# Altium PCB PCB1.PcbDoc
Units mm, origin at the board's own origin, x right, y up, seen from the top; angles counter-clockwise.
Board outline 50 x 50 mm, 4 copper layers (Top Layer, GND_t, GND_b, Bottom Layer), stack 0.442 mm thick; 82 components, 56 nets, 311 pads, 384 vias.
Unrouted connection lines stored in the file: 3.
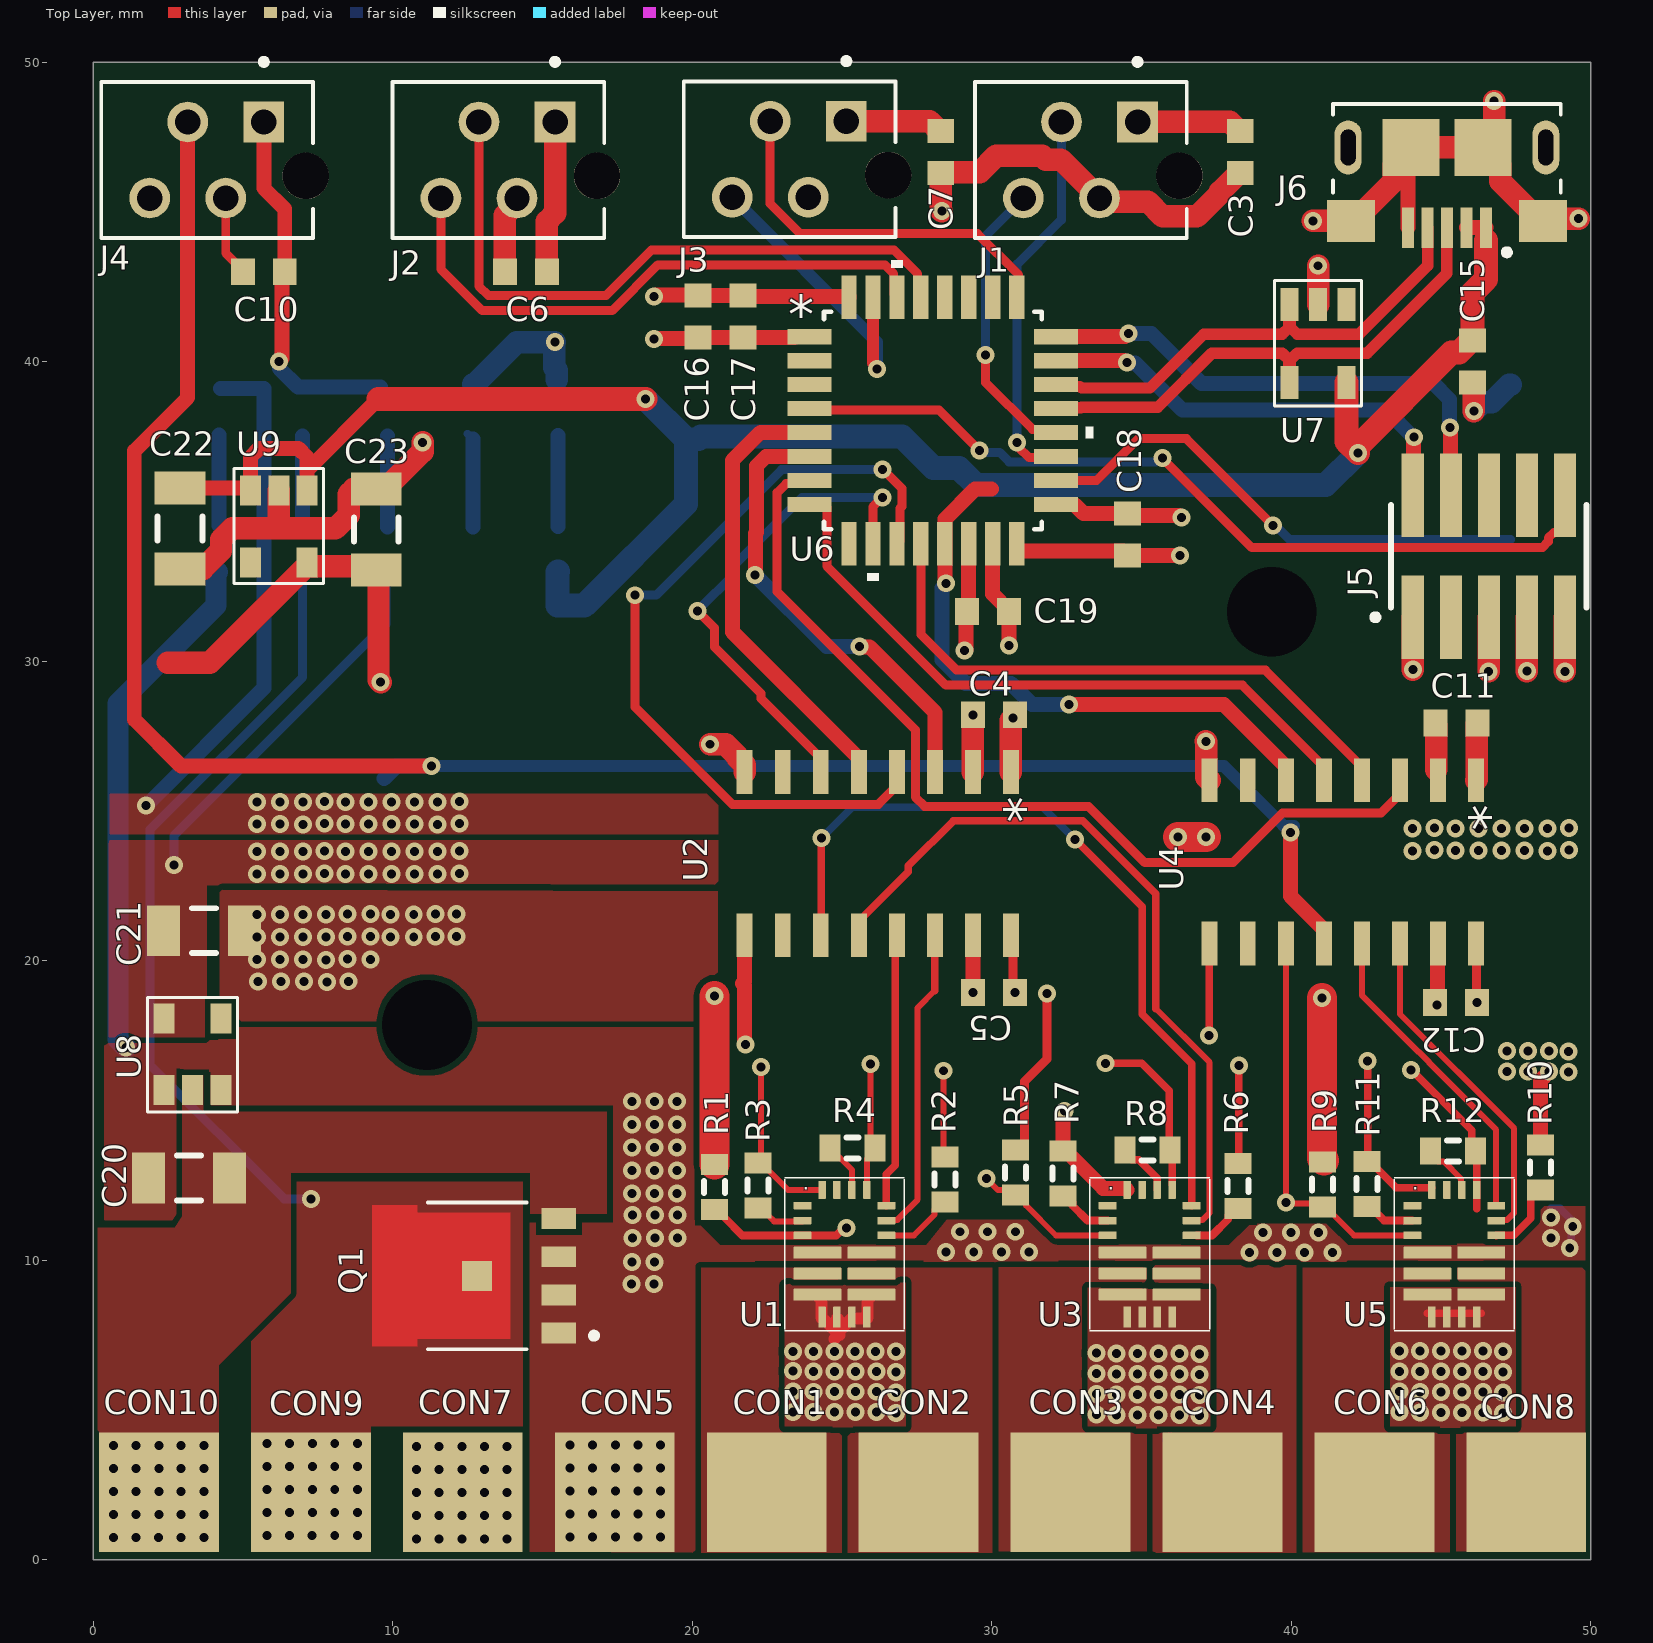
[diagram p0: Top Layer view]
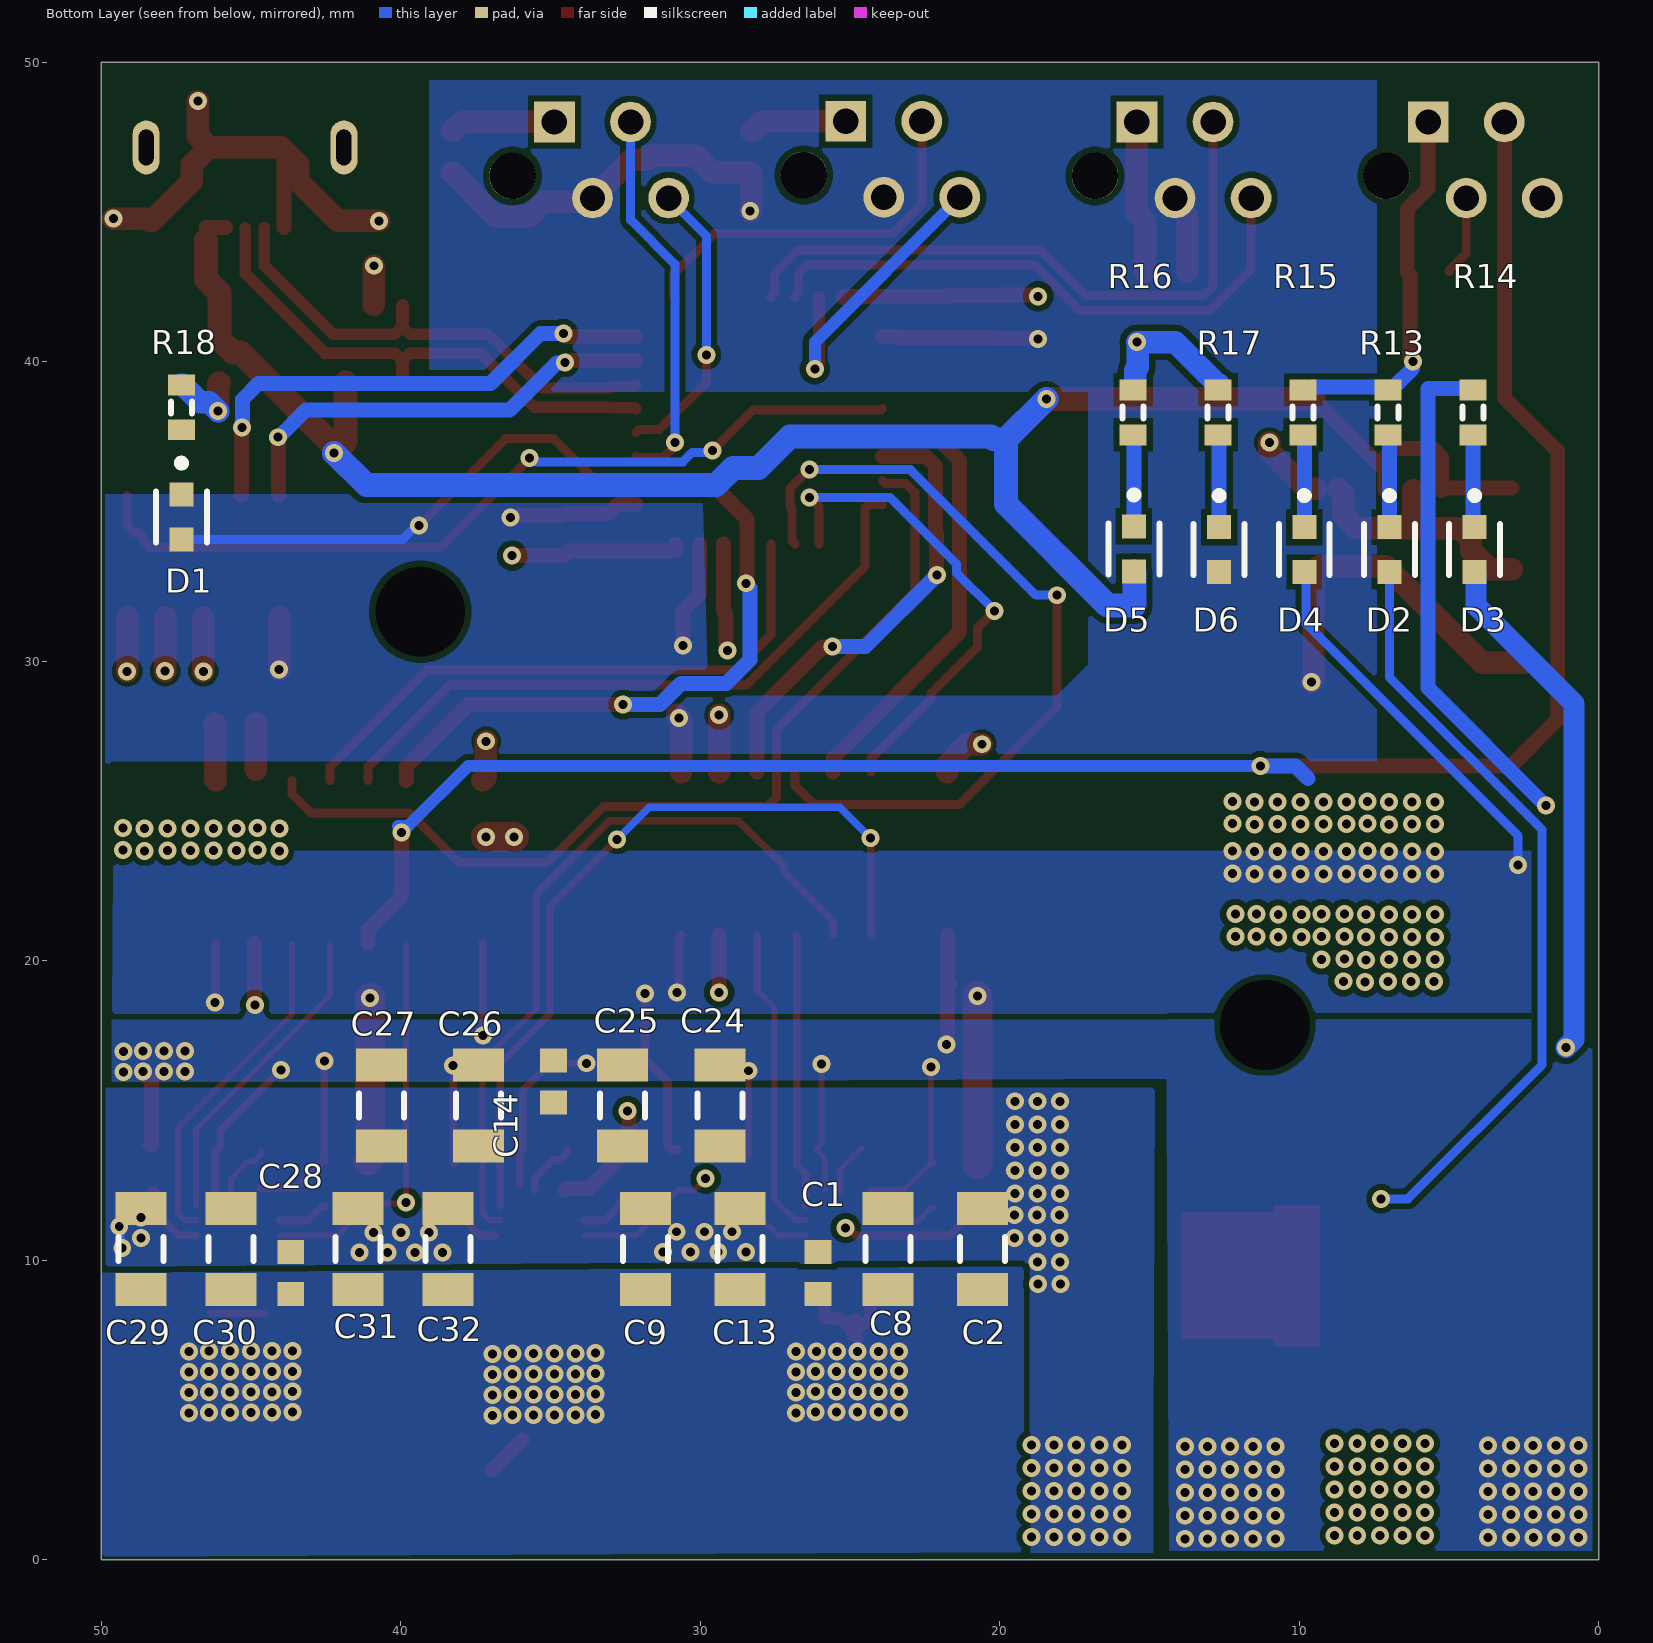
[diagram p1: Bottom Layer view, seen from below]
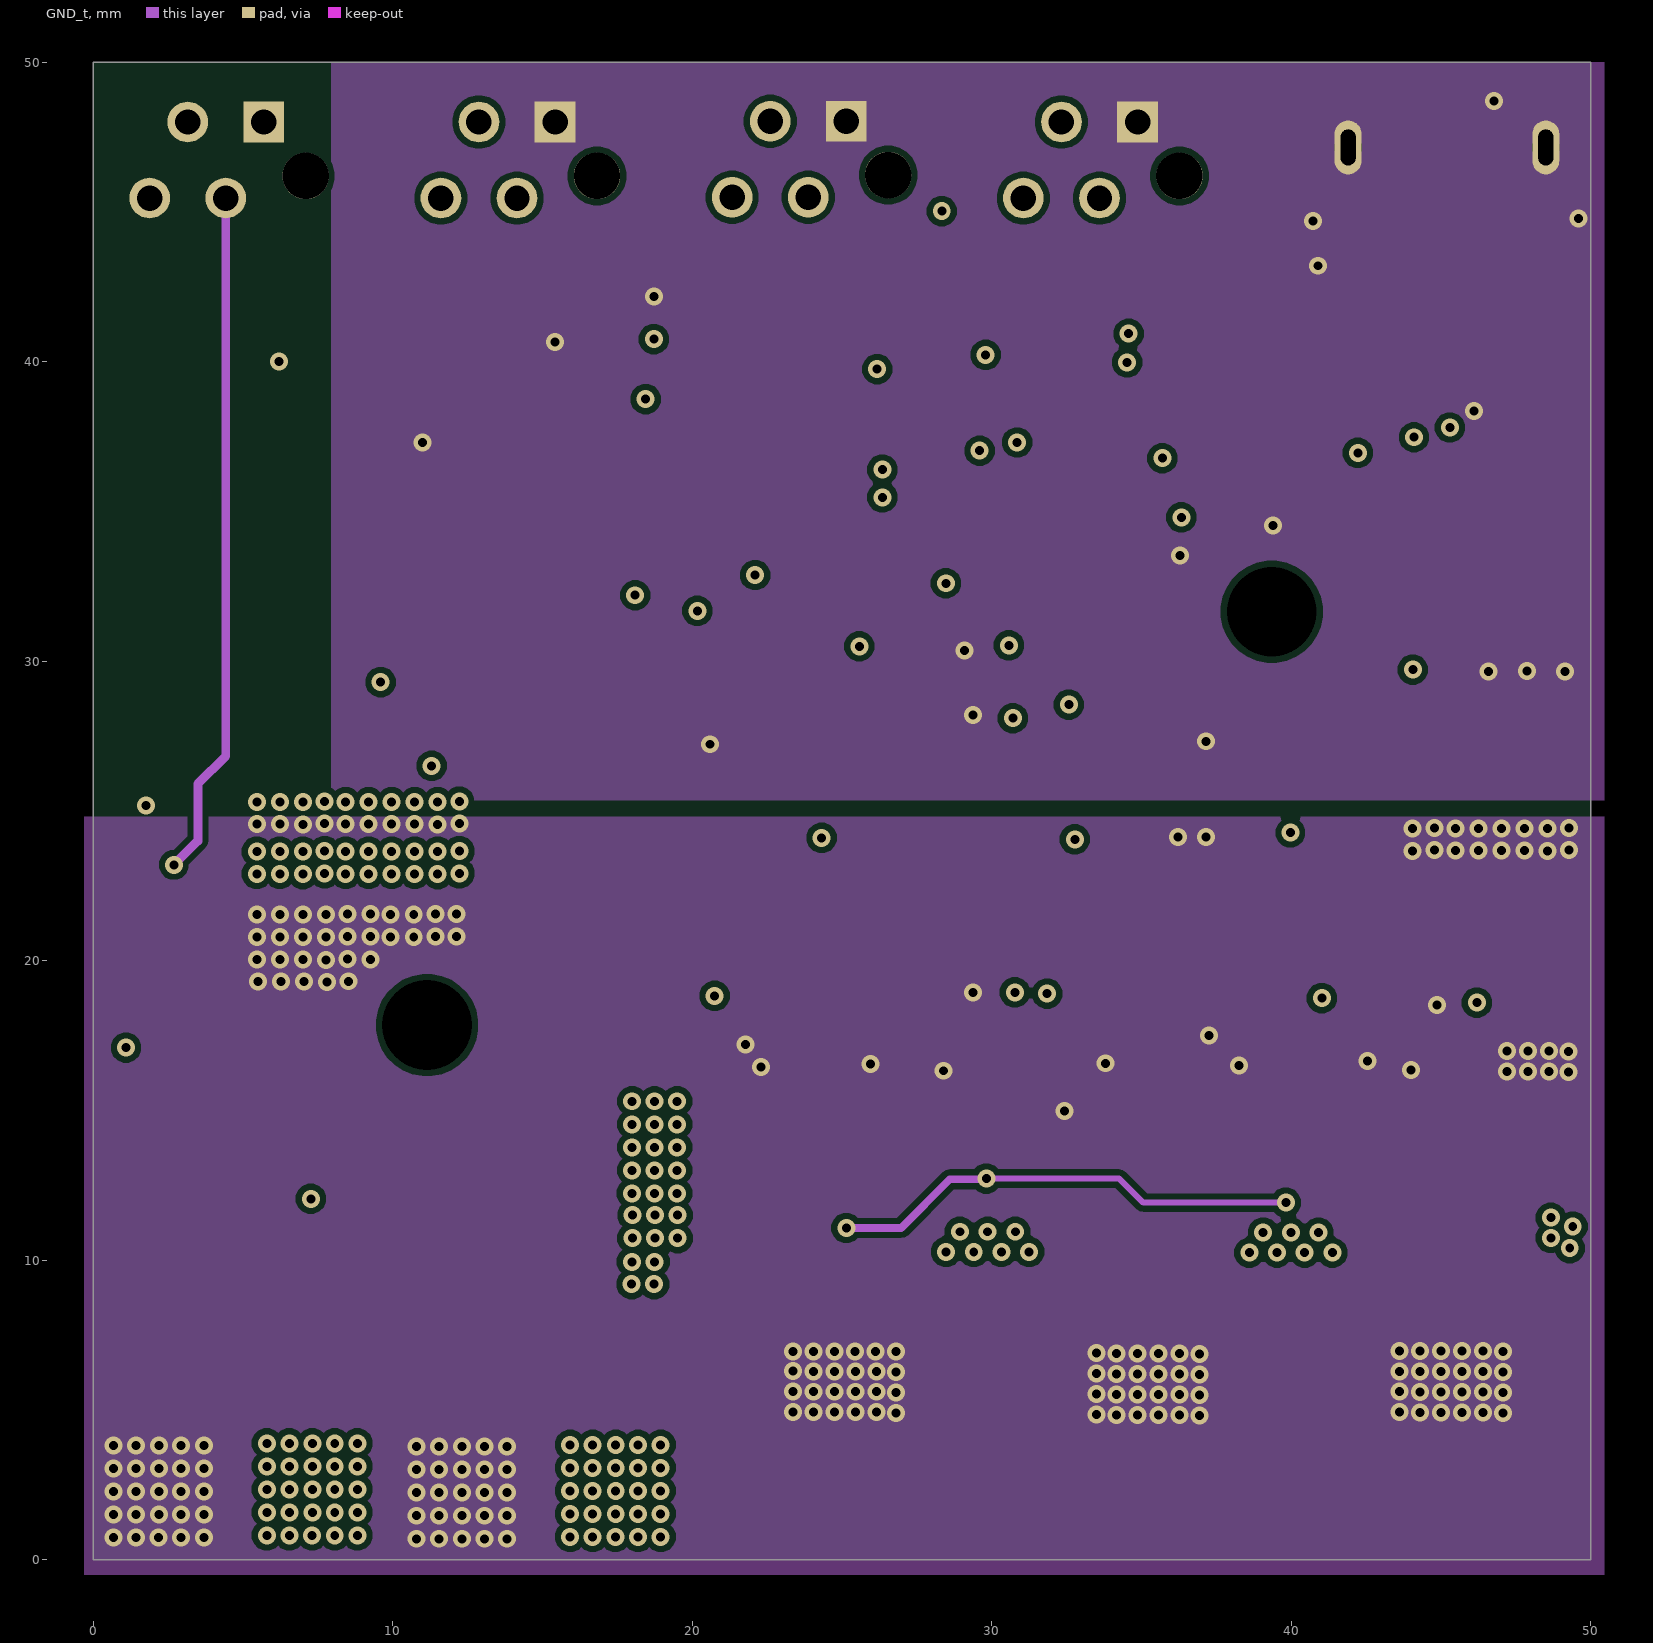
[diagram p2: GND_t]
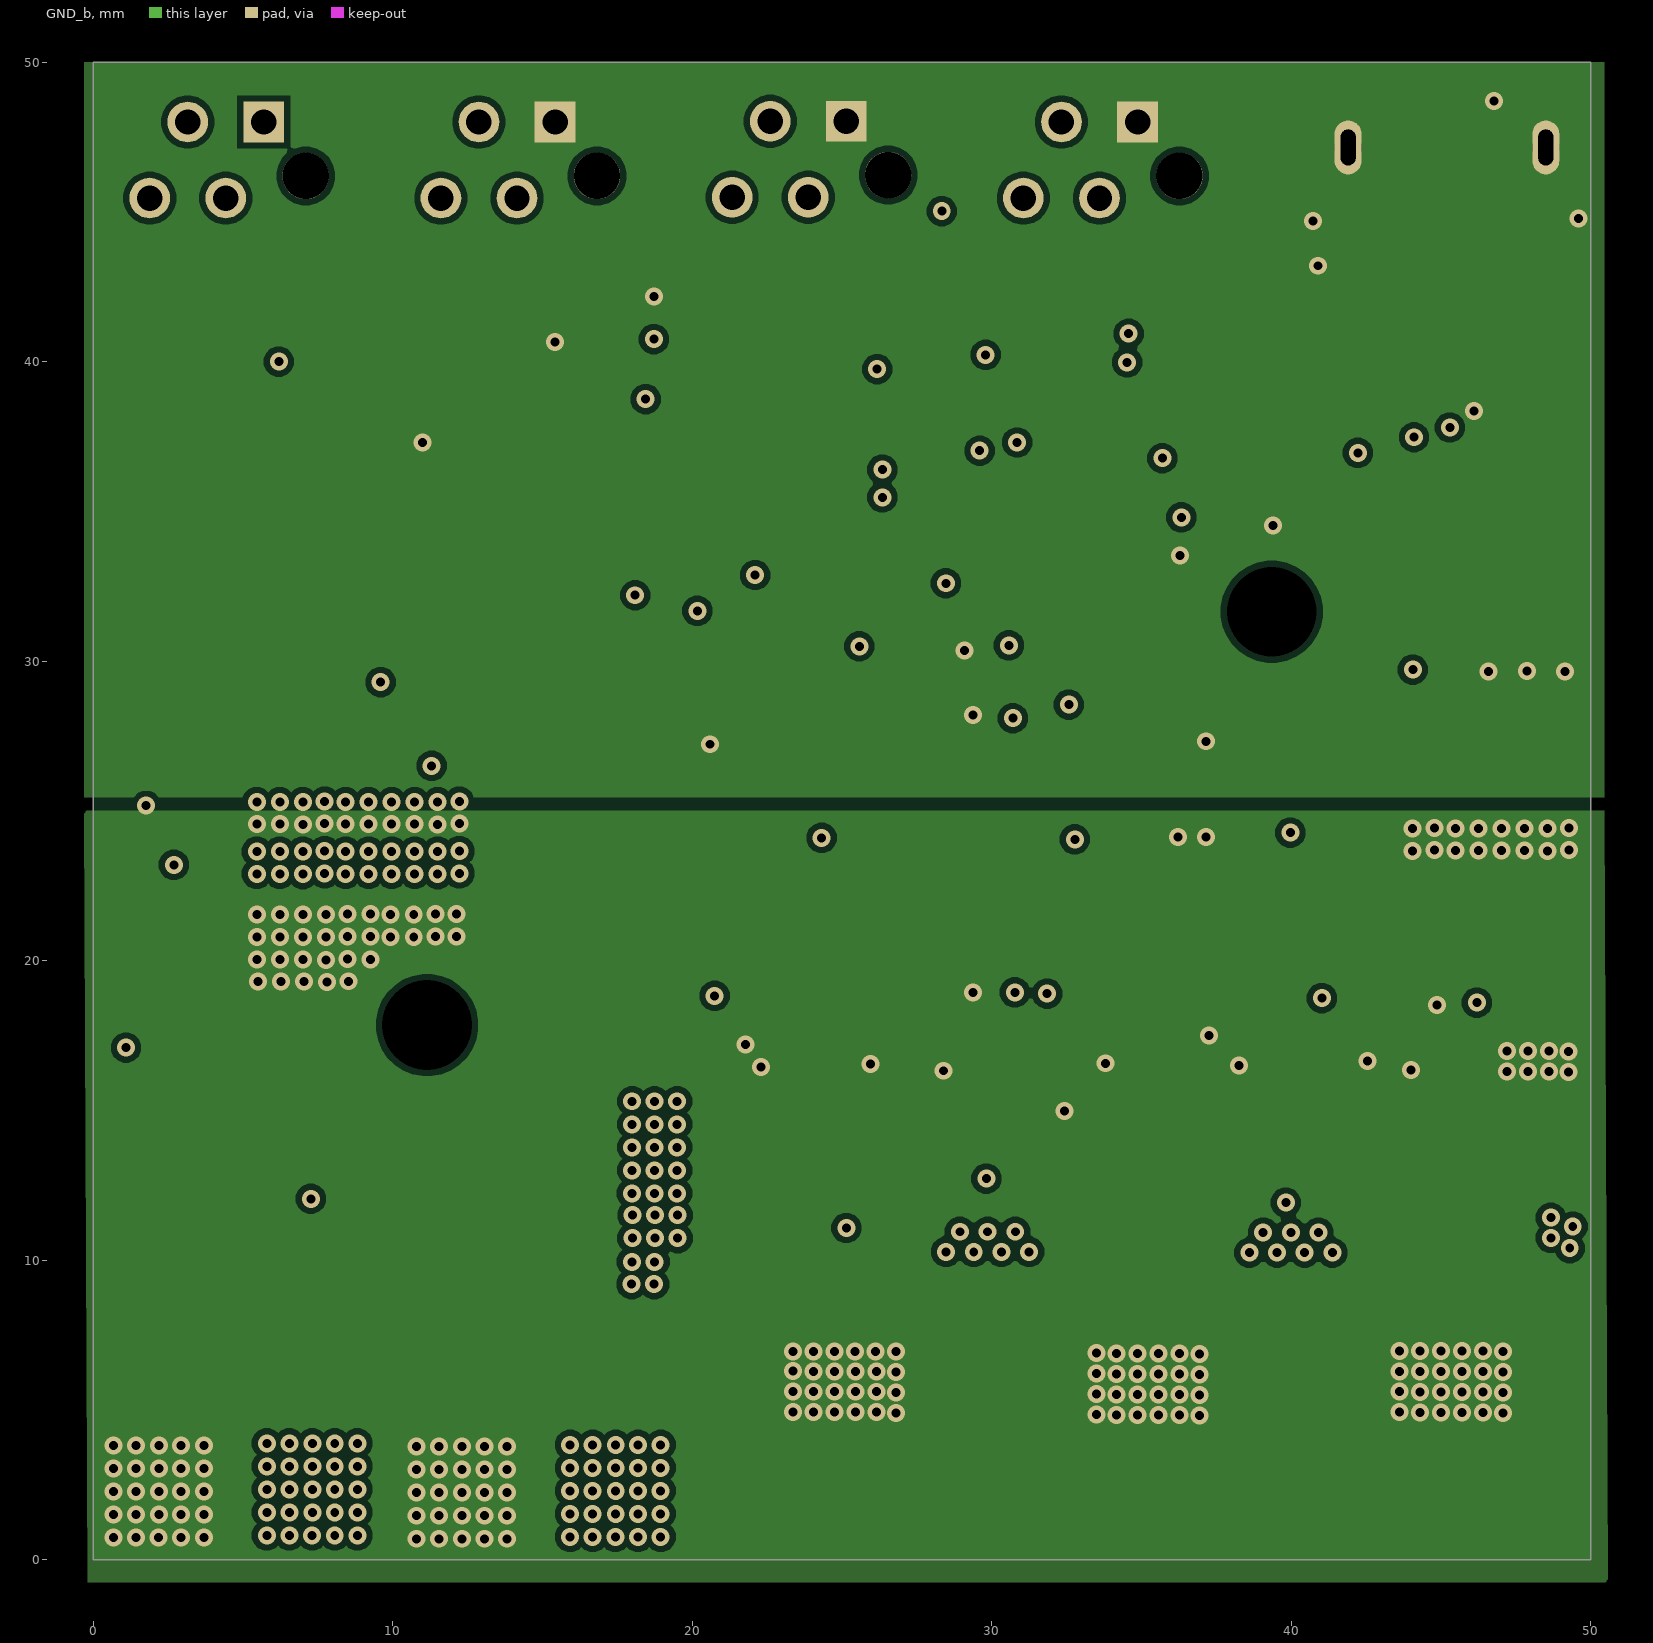
[diagram p3: GND_b]

## Layer stack, top to bottom
Top Solder: solder mask 0.0102, Solder Resist, Dk 3.5
Top Layer: signal copper 0.035
Dielectric 2: prepreg 0.1, PP-006, Dk 4.1
GND_t: signal copper 0.035
Dielectric 1: core 0.1016, Core-009, Dk 4.5
GND_b: signal copper 0.035
Dielectric 3: prepreg 0.1, PP-006, Dk 4.1
Bottom Layer: signal copper 0.035
Bottom Solder: solder mask 0.0102, Solder Resist, Dk 3.5

## Board outline
0,0 50,0 50,50 0,50

## Design rules (kind name [scope] priority, off if disabled: settings)
Clearance [All] p1: gap=0.2 ignorepadtopadclearanceinfootprint=TRUE except(0: Arc-Hole Track-Hole SMDPad-Hole THPad-Hole Via-Hole Fill-Hole Poly-Hole Region-Hole Text-Hole)
DiffPairsRouting [All] p1: maxlimit=0.254 minlimit=0.254 mostfreqgap=0.254 toplayer_minwidth=0.381 toplayer_maxwidth=0.381 toplayer_prefwidth=0.381 midlayer1_minwidth=0.381 midlayer1_maxwidth=0.381 midlayer1_prefwidth=0.381 midlayer2_minwidth=0.381 midlayer2_maxwidth=0.381 midlayer2_prefwidth=0.381 bottomlayer_minwidth=0.381 bottomlayer_maxwidth=0.381 bottomlayer_prefwidth=0.381 maxuncoupledlength=12.7
MinimumSolderMaskSliver [All] p1: minsoldermaskwidth=0.1
PolygonConnect [All] p1: connectstyle=Direct reliefconductorwidth=0.254 reliefentries=4 polygonreliefangle="90 Angle" airgapwidth=0.254
RoutingVias [All] p1: holewidth=0.3 width=0.6 viastyle="Through Hole" minholewidth=0.2 minwidth=0.45 maxholewidth=3 maxwidth=5
SolderMaskExpansion [All] p1: expansion=0.05 istentingtop=FALSE
Width [All] p1: maxlimit=2 minlimit=0.1 preferedwidth=0.254
28 further rules are at their usual default settings.

## Classes and differential pairs
differential pair class diff_USB: USB_D
component class Motorcontroller: C1 C2 C3 C4 C5 C6 C7 C8 C9 C10 C11 C12 C13 C14 C24 C25 C26 C27 C28 C29 C30 C31 C32 CON1 CON2 CON3 CON4 CON5 CON6 CON7 CON8 J1 J2 J3 J4 R1 R2 R3 R4 R5 R6 R7 R8 R9 R10 R11 R12 U1 U2 U3 U4 U5
component class Mainboard: C15 C16 C17 C18 C19 C20 C21 C22 C23 CON9 CON10 D1 D2 D3 D4 D5 D6 J5 J6 Q1 R13 R14 R15 R16 R17 R18 U6 U7 U8 U9
differential pair USB_D: +USB_D_P -USB_D_N

## Components (designator, comment, footprint, x,y, rotation, side; value= is the part's Value field where it differs from the comment)
C1 "Cap Semi" 1608[0603] 26.075,9.575 r90 bottom value=100nF
C2 "Cap Semi" C1206 20.575,10.375 r90 bottom value=10uF
C3 "Cap Semi" 1608[0603] 38.3,47 r270 top value=100nF
C4 "Cap Semi" 1608[0603] 30.075,28.209 r0 top value=100nF
C5 "Cap Semi" 1608[0603] 30.075,18.941 r0 top value=100nF
C6 "Cap Semi" 1608[0603] 14.45,43 r180 top value=100nF
C7 "Cap Semi" 1608[0603] 28.3,47 r270 top value=100nF
C8 "Cap Semi" C1206 23.729,10.375 r90 bottom value=10uF
C9 "Cap Semi" C1206 31.825,10.375 r90 bottom value=10uF
C10 "Cap Semi" 1608[0603] 5.7,43 r180 top value=100nF
C11 "Cap Semi" 1608[0603] 45.524,27.931 r0 top value=100nF
C12 "Cap Semi" 1608[0603] 45.5,18.6 r0 top value=100nF
C13 "Cap Semi" C1206 28.671,10.375 r90 bottom value=10uF
C14 "Cap Semi" 1608[0603] 34.9,15.969 r270 bottom value=100nF
C15 "Cap Semi" 1608[0603] 46.05,40 r90 top value=100pF
C16 "Cap Semi" 1608[0603] 20.2,41.5 r270 top value=1uF
C17 "Cap Semi" 1608[0603] 21.7,41.5 r270 top value=10nF
C18 "Cap Semi" 1608[0603] 34.535,34.225 r90 top value=100nF
C19 "Cap Semi" 1608[0603] 29.875,31.65 r0 top value=100nF
C20 "Cap Semi" C1206 3.2,12.75 r180 top value=10uF
C21 "Cap Semi" C1206 3.7,21 r180 top value=10uF
C22 "Cap Semi" C1206 2.906,34.425 r90 top value=10uF
C23 "Cap Semi" C1206 9.454,34.4 r270 top value=10uF
C24 "Cap Semi" C1206 29.346,15.169 r270 bottom value=10uF
C25 "Cap Semi" C1206 32.596,15.169 r270 bottom value=10uF
C26 "Cap Semi" C1206 37.4,15.169 r270 bottom value=10uF
C27 "Cap Semi" C1206 40.65,15.169 r270 bottom value=10uF
C28 "Cap Semi" 1608[0603] 43.675,9.575 r90 bottom value=100nF
C29 "Cap Semi" C1206 48.675,10.375 r90 bottom value=10uF
C30 "Cap Semi" C1206 45.675,10.375 r90 bottom value=10uF
C31 "Cap Semi" C1206 41.425,10.375 r90 bottom value=10uF
C32 "Cap Semi" C1206 38.425,10.375 r90 bottom value=10uF
CON1 "Moter1 +" con_soldering 22.589,2.25 r0 top
CON2 "Motor1 -" con_soldering 27.661,2.25 r0 top
CON3 "Motor2 +" con_soldering 32.733,2.25 r0 top
CON4 "Motor2 -" con_soldering 37.806,2.25 r0 top
CON5 "Thrower +" con_soldering 17.517,2.25 r0 top
CON6 "Motor3 +" con_soldering 42.878,2.25 r0 top
CON7 "Thrower -" con_soldering 12.444,2.25 r0 top
CON8 "Motor3 -" con_soldering 47.95,2.25 r0 top
CON9 "BAT+" con_soldering 7.372,2.25 r0 top
CON10 "BAT-" con_soldering 2.2,2.35 r90 top
D1 "LTST-C190GKT" FP-LTST-C190GKT-MFG 47.325,34.81 r270 bottom
D2 "LTST-C190GKT" FP-LTST-C190GKT-MFG 6.994,33.725 r270 bottom
D3 "LTST-C190GKT" FP-LTST-C190GKT-MFG 4.15,33.725 r270 bottom
D4 "LTST-C190GKT" FP-LTST-C190GKT-MFG 9.838,33.725 r270 bottom
D5 "LTST-C190GKT" FP-LTST-C190GKT-MFG 15.525,33.75 r270 bottom
D6 "LTST-C190GKT" FP-LTST-C190GKT-MFG 12.681,33.725 r270 bottom
J1 "Encoder_1" TE_7-215079-4 34.87,48 r0 top
J2 "Encoder_2" TE_7-215079-4 15.423,48 r0 top
J3 "Encoder_3" TE_7-215079-4 25.147,48.025 r0 top
J4 "PWM_thrower" TE_7-215079-4 5.7,48 r0 top
J5 "FTSH-105-XX-X-DV" SAMTEC_FTSH-105-XX-X-DV 46.6,33.5 r0 top
J6 "10118193-0001LF" FCI_10118193-0001LF 45.2,47.15 r180 top
Q1 "BUK6Y10-30P" TRANS_PSMN5R5-60YS,115 12.825,9.48 r180 top
R1 "Res3" J1-0603 20.746,12.45 r90 top value=10K
R2 "Res3" J1-0603 28.45,12.7 r90 top value=10K
R3 "Res3" J1-0603 22.2,12.5 r90 top value=3.3K
R4 "Res3" J1-0603 25.35,13.75 r0 top value=100K
R5 "Res3" J1-0603 30.8,12.925 r90 top value=10K
R6 "Res3" J1-0603 38.225,12.475 r90 top value=10K
R7 "Res3" J1-0603 32.375,12.9 r90 top value=3.3K
R8 "Res3" J1-0603 35.2,13.675 r0 top value=100K
R9 "Res3" J1-0603 41.05,12.525 r90 top value=10K
R10 "Res3" J1-0603 48.325,13.1 r90 top value=10K
R11 "Res3" J1-0603 42.525,12.55 r90 top value=3.3K
R12 "Res3" J1-0603 45.4,13.65 r0 top value=100K
R13 "Res3" J1-0603 7.038,38.304 r270 bottom value=15K
R14 "Res3" J1-0603 4.2,38.304 r270 bottom value=15K
R15 "Res3" J1-0603 9.875,38.304 r270 bottom value=3.9K
R16 "Res3" J1-0603 15.55,38.304 r270 bottom value=3.9K
R17 "Res3" J1-0603 12.713,38.304 r270 bottom value=2.2K
R18 "Res3" J1-0603 47.325,38.475 r270 bottom value=2.2K
U1 "PDRV8243HRXYQ1" DRV8243_motor_driver 25.087,10.2 r0 top
U2 "MAX14930AASE+" 21-0041_S16+1_MXM 26.2,23.575 r270 top
U3 "PDRV8243HRXYQ1" DRV8243_motor_driver 35.275,10.2 r0 top
U4 "MAX14930AASE+" 21-0041_S16+1_MXM 41.725,23.297 r270 top
U5 "PDRV8243HRXYQ1" DRV8243_motor_driver 45.446,10.2 r0 top
U6 "STM32G441KBT6" LQFP-32 28.035,38.031 r0 top
U7 "CM1223_ESD" CM1223_ESD 40.9,40.6 r180 top
U8 "NCV8730" NCP164CSN330T1G_Voltage_regulator 3.325,16.875 r180 top
U9 "NCP164" NCP164CSN330T1G_Voltage_regulator 6.2,34.5 r0 top

## Footprints (in the part's own frame and the unit in brackets; to place one, negate y for a bottom-side part, rotate by r counter-clockwise, add the part's x,y. Pads: shape width x height; smd on the part's side, far side on the other; paste and mask are expansions set on the pad)
21-0041_S16+1_MXM [mm]
  rect 1.456x0.533 smd paste+0 mask+0: 1(-2.722,4.445) 2(-2.722,3.175) 3(-2.722,1.905) 4(-2.722,0.635) 5(-2.722,-0.635) 6(-2.722,-1.905) 7(-2.722,-3.175) 8(-2.722,-4.445) 9(2.722,-4.445) 10(2.722,-3.175) 11(2.722,-1.905) 12(2.722,-0.635) 13(2.722,0.635) 14(2.722,1.905) 15(2.722,3.175) 16(2.722,4.445)
  body extent -3.1,-4.95 3.1,4.95, height 1.76
1608[0603] [mm] "Chip Capacitor, Body 1.6x0.8mm, IPC High Density"
  rect 0.8x0.9 smd: 1(-0.7,0) 2(0.7,0)
  body extent -0.87,-0.48 0.87,0.48, height 1.3
C1206 [mm] "Chip Capacitor, Body 3.2x1.6mm, IPC High Density"
  rect 1.1x1.7 smd: 1(-1.35,0) 2(1.35,0)
  silkscreen extent -0.4,-0.75 0.4,0.75, body extent -1.7,-0.9 1.7,0.9, height 1.3
CM1223_ESD [mm]
  rect 0.6x1.1 smd: 1(-0.95,-1.3) 2(0,-1.3) 3(0.95,-1.3) 4(0.95,1.3) 5(-0.95,1.3)
  silkscreen extent -1.45,-2.1 1.45,2.08
con_soldering [mm]
  rect 4x4 smd: 1(-0.1,0)
DRV8243_motor_driver [mm]
  rrect10% 0.6x0.25 smd: 1(-1.4,1.625) 2(-1.4,1.125) 3(-1.4,0.625) 8(1.4,0.625) 9(1.4,1.125) 10(1.4,1.625)
  rrect10% 1.6x0.4 smd: 4(-0.9,0.05) 4(0.9,0.05) 5(-0.9,-0.65) 6(-0.9,-1.35) 6(0.9,-1.35) 7(0.9,-0.65)
  rrect10% 0.25x0.7 smd: 6(-0.75,-2.1) 6(-0.25,-2.1) 6(0.25,-2.1) 6(0.75,-2.1)
  rrect10% 0.25x0.6 smd: 11(0.75,2.15) 12(0.25,2.15) 13(-0.25,2.15) 14(-0.75,2.15)
  silkscreen extent -2,-2.55 2,2.55
FCI_10118193-0001LF [mm]
  rect 0.4x1.35 smd: 1(-1.3,2.675) 2(-0.65,2.675) 3(0,2.675) 4(0.65,2.675) 5(1.3,2.675)
  rect 1.6x1.4 smd: S1(-3.2,2.45) S2(3.2,2.45)
  rect 1.9x1.9 smd: S3(1.2,0) S4(-1.2,0)
  oval 0.9x1.8 hole 0.5 slot 1.2 at 90 deg: S5(-3.3,0) S6(3.3,0)
  round 0.5 hole 0.5 unplated: ""(-3.3,0) ""(3.3,0)
  silkscreen extent -3.8,-1.45 3.8,3.6
FP-LTST-C190GKT-MFG [mm]
  rect 0.8x0.8 smd paste+0 mask+0: 1(-0.75,0) 2(0.75,0)
  silkscreen extent -1.92,-0.85 0.85,0.85, body extent -0.8,-0.4 0.8,0.4, height 0.9
J1-0603 [mm] "Chip Resistor, Body 1.6x0.8mm, IPC High Density"
  rect 0.7x0.9 smd: 1(-0.75,0) 2(0.75,0)
  silkscreen extent -0.2,-0.35 0.2,0.35, body extent -0.85,-0.48 0.85,0.48, height 0.9
LQFP-32 [mm]
  rect 1.462x0.507 smd paste+0 mask+0: 1(-4.115,2.8) 2(-4.115,2) 3(-4.115,1.2) 4(-4.115,0.4) 5(-4.115,-0.4) 6(-4.115,-1.2) 7(-4.115,-2) 8(-4.115,-2.8) 17(4.115,-2.8) 18(4.115,-2) 19(4.115,-1.2) 20(4.115,-0.4) 21(4.115,0.4) 22(4.115,1.2) 23(4.115,2) 24(4.115,2.8)
  rect 0.507x1.462 smd paste+0 mask+0: 9(-2.8,-4.115) 10(-2,-4.115) 11(-1.2,-4.115) 12(-0.4,-4.115) 13(0.4,-4.115) 14(1.2,-4.115) 15(2,-4.115) 16(2.8,-4.115) 25(2.8,4.115) 26(2,4.115) 27(1.2,4.115) 28(0.4,4.115) 29(-0.4,4.115) 30(-1.2,4.115) 31(-2,4.115) 32(-2.8,4.115)
  silkscreen extent -3.63,-5.35 5.35,5.35, body extent -4.5,-4.5 4.5,4.5, height 1.6
NCP164CSN330T1G_Voltage_regulator [mm] "For NCP164CSN330T1G_Voltage_regulator and for NCV8730"
  rect 0.7x1 smd: 1(0.95,1.2) 2(0,1.2) 3(-0.95,1.2) 4(-0.95,-1.2) 5(0.95,-1.2)
  silkscreen extent -1.5,-1.9 1.5,1.92
SAMTEC_FTSH-105-XX-X-DV [mm]
  rect 0.74x2.79 smd: 01(-2.54,-2.035) 02(-2.54,2.035) 03(-1.27,-2.035) 04(-1.27,2.035) 05(0,-2.035) 06(0,2.035) 07(1.27,-2.035) 08(1.27,2.035) 09(2.54,-2.035) 10(2.54,2.035)
  silkscreen extent -3.89,-2.13 3.26,1.72, body extent -3.17,-2.92 3.17,2.92, height 6.13
TE_7-215079-4 [mm]
  rect 1.358x1.358 hole 0.85: 1(0,0)
  round 1.358 hole 0.85: 2(-1.27,-2.54) 3(-2.54,0) 4(-3.81,-2.54)
  round 1.55 hole 1.55 unplated: ""(1.4,-1.8)
  silkscreen extent -5.43,-3.87 1.65,2.11
TRANS_PSMN5R5-60YS,115 [mm]
  rect 1x1 smd paste-1 mask+0: D(0,0)
  rect 1.15x0.7 smd paste-2 mask+0: G(-2.725,-1.905) S(-2.725,1.905) S(-2.725,-0.635) S(-2.725,0.635)
  Top Layer region: 3.5,-2.35 2,-2.35 2,-2.1 -1.1,-2.1 -1.1,2.1 2,2.1 2,2.35 3.5,2.35
  silkscreen extent -4,-2.45 1.65,2.45, body extent -3,-2.45 3,2.45, height 1.2

## Part data
C1 C2 C3 C4 C5 C6 C7 C8 C9 C10 C11 C12 C13 C14 C15 C16 C17 C18 C19 C20 C21 C22 C23 C24 C25 C26 C27 C28 C29 C30 C31 C32: "Capacitor (Semiconductor SIM Model)", LatestRevisionDate=29-May-2009, LatestRevisionNote="IPC-7351 Footprint Added.", PackageDescription="Chip Capacitor", PackageReference=C1206, Published=8-Jun-2000, Publisher="Altium Limited"
CON1 CON2 CON3 CON4 CON5 CON6 CON7 CON8 CON9 CON10: library part Con_soldering
D1 D2 D3 D4 D5 D6: library part CMP-22017-000005-2, "LED GREEN CLEAR CHIP SMD", Case Code (Imperial)=0603, Case Code (Metric)=1608, Color=Green, Forward Current=30mA, Forward Voltage=2.1V, Lens Color=Colorless, Max Operating Temperature=85°C, Min Operating Temperature=-55°C, Package Quantity=1, Power Dissipation=100mW, Reverse Voltage=5V, Test Current=10mA, Voltage=2V, Case/Package=0603, Depth=0.8mm, Dominant Wavelength=569nm, Height=0.8mm, Illumination Color=Green, Lead Free="Lead Free", Length=1.6mm, Lens Style=Clear, Lens Transparency=Clear, Luminous Intensity=6mcd, Mount="Surface Mount", Number of Elements=1, Number of LEDs=1, Number of Pins=2, Packaging="Tape and Reel", Power Rating=100mW, Radiation Hardening=No, Viewing Angle=130°, Wavelength=565nm, Width=0.8mm
J1 J2 J3 J4: library part Con_4_encoder, "Micro-MaTch 4 Position 1.27 mm Pitch Vertical Female-on-Board Connector", Package=SMD-6, Availability=Unavailable, MF="TE Connectivity", MP=7-215079-4, Price=None, SnapEDA_Link=https://www.snapeda.com/parts/7-215079-4/TE%20Connectivity%20AMP%20Connectors/view-part/453401/?ref=snap
J5: "Connector Header Surface Mount 10 position 0.050\" (1.27mm)", Package=None, Availability=Unavailable, MP=FTSH-105-XX-X-DV, Price=None
J6: "USB - micro B USB 2.0 Receptacle Connector 5 Position Surface Mount, Right Angle; Through Hole", Package=None, Availability=Unavailable, MF="Amphenol ICC", MP=10118193-0001LF, Price=None, SnapEDA_Link=https://www.snapeda.com/parts/10118193-0001LF/Amphenol%20FCI/view-part/2758989/?ref=snap
R1 R2 R3 R4 R5 R6 R7 R8 R9 R10 R11 R12 R13 R14 R15 R16 R17 R18: "Resistor", LatestRevisionDate=29-May-2009, LatestRevisionNote="IPC-7351 Footprint Added.", PackageDescription="Chip Resistor", PackageReference=J1-0603, Published=8-Jun-2000, Publisher="Altium Limited"
U2 U4: "No Description Available", Mfr_Name="Maxim Integrated Products", Copyright="Copyright (C) 2021 Ultra Librarian. All rights reserved.", Manufacturer_Part_Number=MAX14930AASE+, RefDes=RefDes, Type=DEV
U6: "No Description Available", Mfr_Name=STMicroelectronics, Copyright="Copyright (C) 2021 Ultra Librarian. All rights reserved.", Digi-Key_Part_Number_1=STM32G441KBT6-ND, Manufacturer_Part_Number=STM32G441KBT6, RefDes=RefDes, Type=DEV

## Free pads (board coordinates)
  round 1.524 hole 3: 2(11.15,17.85) 3(39.35,31.65)

## Via types
v1: diameter 0.6, hole 0.3, Top Layer to Bottom Layer, 384 vias

## Nets (pads, with @x,y where several pads share a name; then routed paths per layer and width w, separated by ;. In a path a pad name is that pad's centre, name@x,y a point inside that pad or via, vN(x,y) a via of type N, cw(c..) or ccw(c..) an arc to the next point about the centre after c; other vN are vias at no path point)
+3.3V: C3.2 C4.2 C6.2 C7.2 C11.2 C16.2 C17.2 C18.2 C19.2 C23.2 D6.2 J1.2 J2.2 J3.2 J5.01 U2.1 U4.1 U6.1 U6.15 U6.17 U9.5 | length 46.5
  Top Layer w0.5: v1(18.725,40.75) 18.744,40.769 20.169,40.769 C16.2 23.412,40.8 23.443,40.831 U6.1 ; U6.15 30.035,32.24 30.575,31.7 v1(30.575,30.525) ; U6.17 32.154,35.227 32.765,35.227 33.067,34.925 C18.2@34.485,34.925 ; C18.2@34.603,34.857 36.278,34.857 v1(36.335,34.8)
  Top Layer w0.75: 2.5,29.95 3.9,29.95 7.125,33.175 9.329,33.175 9.529,32.975 9.529,29.371 v1(9.6,29.3) ; C6.2 13.75,44.892 14.153,45.295 J2.2 ; C7.2 28.3,45.059 v1(28.334,45.025) ; C7.2@28.316,46.3 28.341,46.325 29.603,46.325 30.153,46.875 31.682,46.875 31.811,46.746 32.314,46.746 33.716,45.344 35.217,45.344 35.711,44.85 36.85,44.85 37.62,45.62 37.62,45.67 38.25,46.3 C3.2 ; U2.1 30.645,28.029 C4.2@30.75,28.134 ; v1(30.71,28.094) 30.775,28.159 C4.2 ; v1(44.06,29.715) J5.01 ; U4.1 46.199,26.048 46.199,27.906 C11.2
+5V: C15.2 C22.2 D5.2 J6.1 J6.2 U7.5 U9.1 U9.3 | length 65.5
  Top Layer w0.5: C22.2 U9.3@5.073,35.775 ; U9.3 5.25,36.807 5.543,37.1 6.857,37.1 7.15,36.807 7.15,36.375 ; U9.1 7.15,36.375 ; 9.525,38.75 7.15,36.375 ; J6.2 J6.1
  Top Layer w0.8: 9.525,38.75 v1(18.45,38.75) ; U7.5 41.85,37.325 v1(42.225,36.95) 42.225,37.174 45.351,40.3 45.6,40.3 46,40.7 C15.2@46.025,40.7 ; C15.2 46.05,42.3 46.5,42.75 J6.1@46.5,44.05
  Bottom Layer w0.8: D5.2 15.5,32.975 15.5,31.85 16.399,31.85 19.792,35.244 19.792,37.408 ; v1(18.45,38.75) 19.792,37.408 ; v1(42.225,36.95) 41.15,35.875 29.477,35.875 28.902,36.45 28.061,36.45 27.011,37.5 20.299,37.5 20.207,37.408 19.792,37.408
+5V_P: C5.2 C10.2 C12.2 C21.2 D4.2 J4.2 R1.2 R5.2 R9.2 U2.16 U4.16 U8.5 | length 59.3
  Top Layer w0.3: J4.2 4.43,43.62 5,43.05 C10.2 ; U2.16 30.71,20.788 30.71,19.006 v1(30.775,18.941) ; R5.2@30.775,13.7 R5.2 30.9,13.675 31.1,13.875 31.1,15.972 31.85,16.722 v1(31.85,18.9) ; R9.2 R9.2@41.1,13.325 ; U4.16 46.185,20.56 46.185,18.615 v1(46.2,18.6)
  Top Layer w1: R1.2 20.746,18.821 v1(20.75,18.825) ; v1(41.025,18.75) 41.025,13.4 R9.2@41.1,13.325
  GND_t w0.3: v1(2.7,23.2) 3.5,24 3.5,25.9 4.43,26.83 J4.2
  Bottom Layer w0.3: v1(2.7,23.2) 2.7,24.166 9.775,31.241 9.775,32.912 D4.2
  other v1: 5.469,22.9 6.237,22.9 7.006,22.888 8.431,22.9 9.2,22.9 9.969,22.9 10.737,22.9 11.506,22.888 7.731,22.915 12.231,22.915 5.469,23.644 6.237,23.644 7.006,23.644 7.731,23.659 8.431,23.644 9.2,23.644 9.969,23.644 10.737,23.644 11.506,23.644 12.231,23.659
+16V: C1.2 C2.2 C8.2 C9.2 C13.2 C14.2 C20.2 C24.2 C25.2 C26.2 C27.2 C28.2 C29.2 C30.2 C31.2 C32.2 CON5.1 D3.2 Q1.S U1.4 U3.4 U5.4 U8.1 U8.3 | length 19.2
  Bottom Layer w0.254: C29.2 48.977,11.725 49.4,11.302 v1(49.4,11.125) 49.35,11.075 49.35,10.45 v1(49.3,10.4)
  Bottom Layer w0.7: v1(1.1,17.1) 0.825,17.375 0.825,28.584 4.1,31.859 4.1,32.925 D3.2
  other v1: 15.925,0.763 16.681,0.763 17.437,0.763 18.194,0.763 18.95,0.763 15.925,1.531 16.681,1.531 17.45,1.531 18.194,1.531 18.95,1.531 15.925,2.3 16.681,2.3 17.45,2.3 18.194,2.3 18.95,2.3 15.925,3.069 16.681,3.069 17.45,3.069 18.194,3.069 18.95,3.069 15.925,3.837 16.681,3.837 17.45,3.837 18.194,3.837 18.95,3.837 17.978,9.198 18.734,9.198 17.989,9.945 18.746,9.945 38.602,10.25 39.526,10.25 40.45,10.25 41.374,10.25 28.478,10.275 29.402,10.275 30.326,10.275 31.25,10.275 18.003,10.738 18.759,10.738 19.515,10.738 48.673,10.743 39.064,10.925 39.988,10.925 40.912,10.925 28.94,10.95 29.864,10.95 30.788,10.95 48.673,11.418 18.015,11.506 18.759,11.506 19.515,11.506 17.988,12.231 18.744,12.231 19.5,12.231 18,13 18.744,13 19.5,13 18,13.769 18.744,13.769 19.5,13.769 18,14.537 18.744,14.537 19.5,14.537 18,15.306 18.744,15.306 19.5,15.306
BAT+: CON9.1 D2.2 Q1.D | length 25.8
  Bottom Layer w0.3: D2.2 6.994,29.469 1.9,24.375 1.9,16.525 6.375,12.05 v1(7.275,12.05)
  other v1: 5.8,0.813 6.556,0.813 7.312,0.813 8.069,0.813 8.825,0.813 5.8,1.581 6.556,1.581 7.325,1.581 8.069,1.581 8.825,1.581 5.8,2.35 6.556,2.35 7.325,2.35 8.069,2.35 8.825,2.35 5.8,3.119 6.556,3.119 7.325,3.119 8.069,3.119 8.825,3.119 5.8,3.887 6.556,3.887 7.325,3.887 8.069,3.887 8.825,3.887
GND: C3.1 C4.1 C6.1 C7.1 C11.1 C15.1 C16.1 C17.1 C18.1 C19.1 C22.1 C23.1 J1.1 J2.1 J3.1 J5.05 J5.07 J5.09 J6.5 J6.S1 J6.S2 J6.S3 J6.S4 J6.S5 J6.S6 R16.1 R17.1 R18.1 U2.2 U2.8 U4.2 U4.8 U6.14 U6.16 U6.32 U7.2 U9.2 | length 75.4
  Top Layer w0.5: v1(18.725,42.175) 18.752,42.175 18.802,42.225 20,42.225 20.025,42.2 C16.1 C17.1 21.727,42.173 25.232,42.173 25.235,42.169 U6.32 ; v1(29.1,30.35) 29.137,30.388 29.137,31.512 C19.1@29.2,31.575 ; C19.1 29.232,31.707 29.232,33.912 U6.14 ; U6.16 30.835,33.679 30.839,33.675 34.385,33.675 C18.1 v1(36.285,33.525) ; J6.5 J6.S3@43.9,47.05
  Top Layer w0.75: C22.1 3.656,33.075 4.271,33.69 4.271,34.061 4.639,34.429 6.365,34.429 ; U9.2 6.2,34.594 6.365,34.429 ; C23.1@8.704,35.75 8.529,35.575 8.529,34.868 8.09,34.429 6.365,34.429 ; C23.1 9.754,35.75 11,36.996 v1(11,37.3) ; C6.1 15.15,44.683 15.423,44.957 J2.1 ; v1(20.6,27.225) 21.121,27.225 21.49,26.856 21.49,26.806 21.755,26.541 U2.8 ; J3.1 27.925,48.025 28.25,47.7 C7.1 ; U2.2 v1(29.375,28.209) ; J1.1 37.95,48 38.25,47.7 C3.1 ; v1(37.15,27.325) 37.171,27.304 37.171,26.128 U4.8 ; v1(40.725,44.7) J6.S2 42.1,44.7 43.425,46.025 43.425,46.575 43.9,47.05 J6.S3 J6.S4 ; U7.2 v1(40.9,43.2) ; C11.1 44.824,27.881 44.849,27.856 U4.2@44.849,26.372 ; C15.1 46.075,39.3 46.1,39.275 v1(46.1,38.35) ; v1@46.6,29.665 v1(46.595,29.66) 46.595,31.46 J5.05 ; v1(46.775,48.7) 46.775,47.525 J6.S4 ; v1(47.87,29.665) J5.07 ; v1@49.14,29.665 v1(49.135,29.66) 49.135,31.46 J5.09 ; v1(49.6,44.775) 48.475,44.775 J6.S1 48.3,44.7 46.975,46.025 46.975,46.575 J6.S4
  Bottom Layer w0.75: R17.1@12.7,39.25 12.75,39.25 14.149,40.649 v1(15.416,40.649) 15.391,40.624 15.391,39.803 15.475,39.719 R16.1@15.475,39.389 ; v1(46.1,38.35) 46.4,38.65 46.7,38.65 47.275,39.225 R18.1
NetCON1_1: CON1.1 U1.5
NetCON2_1: CON2.1 U1.7
NetCON3_1: CON3.1 U3.5
NetCON4_1: CON4.1 U3.7 | length 1.4
  Top Layer w0.5: CON4.1@35.956,4 CON4.1@36.95,3.006
NetCON6_1: CON6.1 U5.5
NetCON8_1: CON8.1 U5.7
NetD1_1: D1.1 R18.2
NetD1_2: D1.2 U6.18 | length 17.1
  Top Layer w0.3: U6.18 33.506,36.031 34.9,37.425 36.5,37.425 v1(39.4,34.525)
  Bottom Layer w0.3: v1(39.4,34.525) 39.481,34.525 39.946,34.06 D1.2
NetD2_1: D2.1 R13.2 | length 3.1
  Bottom Layer w0.254: R13.2@6.994,37.511 R13.2
  Bottom Layer w0.5: D2.1 R13.2@6.994,37.511
NetD3_1: D3.1 R14.2 | length 3.1
  Bottom Layer w0.254: D3.1 D3.1@4.2,34.525
  Bottom Layer w0.5: D3.1@4.2,34.525 R14.2
NetD4_1: D4.1 R15.2 | length 3.1
  Bottom Layer w0.254: R15.2@9.838,37.517 R15.2
  Bottom Layer w0.5: D4.1 R15.2@9.838,37.517
NetD5_1: D5.1 R16.2 | length 3.1
  Bottom Layer w0.254: R16.2@15.525,37.529 R16.2
  Bottom Layer w0.5: D5.1 R16.2@15.525,37.529
NetD6_1: D6.1 R17.2 | length 3.2
  Bottom Layer w0.254: R17.2@12.5,37.59 R17.2@12.681,37.409
  Bottom Layer w0.5: D6.1 R17.2@12.681,37.409
NetJ1_3: J1.3 U6.19 | length 12.9
  Top Layer w0.3: v1(30.85,37.3) 30.907,37.243 30.907,37.132 31.239,36.8 32.119,36.8 U6.19
  Bottom Layer w0.3: v1(30.85,37.3) 30.85,43.253 32.33,44.733 J1.3
NetJ1_4: J1.4 U6.20 | length 9.7
  Top Layer w0.3: v1(29.8,40.225) 29.8,39.301 31.367,37.734 32.046,37.734 U6.20
  Bottom Layer w0.3: v1(29.8,40.225) 29.8,44.2 J1.4
NetJ2_3: J2.3 U6.29 | length 22
  Top Layer w0.3: J2.3 12.883,42.522 13.205,42.2 17.124,42.2 18.65,43.727 26.734,43.727 27.532,42.929 27.532,42.249 U6.29
NetJ2_4: J2.4 U6.30 | length 19.6
  Top Layer w0.3: J2.4 11.613,43.085 12.998,41.7 17.331,41.7 18.857,43.227 26.434,43.227 26.732,42.929 26.732,42.249 U6.30
NetJ3_3: J3.3 U6.25 | length 12.8
  Top Layer w0.3: J3.3 22.607,45.275 23.606,44.275 29.519,44.275 30.896,42.898 30.896,42.218 30.896,42.207 U6.25
NetJ3_4: J3.4 U6.31 | length 10.2
  Top Layer w0.2: v1(26.18,39.75) v1@26.19,39.76
  Top Layer w0.4: U6.31 26.035,39.949 26.19,39.794 v1@26.19,39.76
  Bottom Layer w0.4: J3.4 26.172,40.65 26.172,39.758 v1(26.18,39.75)
NetR2_1: R2.1 U1.8 | length 2.5
  Top Layer w0.2: U1.8 27.4,10.825 28.1,11.525 28.1,11.7 28.35,11.95 R2.1
NetR3_1: R3.1 U1.2 | length 1.7
  Top Layer w0.2: R3.1 22.3,11.75 22.55,11.5 22.55,11.49 22.74,11.3 U1.2@23.687,11.3
NetR4_1: R4.1 U1.12 | length 1.7
  Top Layer w0.2: R4.1 24.7,13.65 25.336,13.014 U1.12@25.336,12.312
NetR6_1: R6.1 U3.8 | length 1.8
  Top Layer w0.254: U3.8@36.848,10.825 37.356,10.825 37.902,11.371 37.902,11.502 38.125,11.725 R6.1
NetR7_1: R7.1 U3.2 | length 1.9
  Top Layer w0.254: R7.1 32.475,12.15 32.698,11.927 32.698,11.827 33.2,11.325 U3.2
NetR8_1: R8.1 U3.12 | length 1.9
  Top Layer w0.254: R8.1 34.45,13.575 34.673,13.352 34.903,13.352 35.523,12.732 35.523,12.352 U3.12
NetR10_1: R10.1 U5.8 | length 2.5
  Top Layer w0.254: U5.8 46.848,10.827 47.434,10.827 48.002,11.395 48.002,12.127 48.225,12.35 R10.1
NetR11_1: R11.1 U5.2 | length 1.7
  Top Layer w0.254: R11.1 42.625,11.8 43.1,11.325 U5.2
NetR12_1: R12.1 U5.12 | length 1.8
  Top Layer w0.2: R12.1 44.65,13.55 44.9,13.3 45.088,13.3 45.671,12.717 45.671,12.375 U5.12
NetU2_3: U2.3 U6.6 | length 15.5
  Top Layer w0.5: v1(22.1,32.875) 22.119,32.894 22.119,34.269 22.142,34.292 22.142,36.507 22.462,36.827 23.917,36.827 U6.6 ; v1(25.58,30.496) 25.599,30.477 25.918,30.477 28.105,28.29 U2.3
  Bottom Layer w0.5: v1(22.1,32.875) 24.479,30.496 v1(25.58,30.496)
NetU2_4: U2.4 U6.11 | length 27.3
  Top Layer w0.3: v1(18.1,32.2) 18.1,28.463 21.344,25.219 26.219,25.219 26.835,25.835 U2.4 ; v1(26.351,36.392) 26.376,36.392 27,35.768 27,35.163 26.934,35.097 26.934,34.015 U6.11
  Bottom Layer w0.3: v1(18.1,32.2) 18.8,32.2 22.992,36.392 v1(26.351,36.392)
NetU2_5: U2.5 U6.5 | length 15.1
  Top Layer w0.5: U6.5 22.275,37.631 21.35,36.705 21.35,30.974 25.565,26.759 U2.5
NetU2_6: U2.6 U6.10 | length 16.7
  Top Layer w0.3: v1(20.175,31.675) 20.75,31.1 20.75,30.47 22.302,28.918 22.302,28.752 24.295,26.759 U2.6 ; U6.10 26.035,35.154 v1(26.35,35.469)
  Bottom Layer w0.3: v1(20.175,31.675) 21.45,32.95 21.45,33.25 23.669,35.469 v1(26.35,35.469)
NetU4_3: U4.3 U6.7 | length 31.8
  Top Layer w0.3: U6.7 23.817,35.927 23.137,35.927 22.839,35.629 22.839,32.318 27.451,27.706 27.451,25.461 27.759,25.154 33.232,25.154 35.111,23.275 38.056,23.275 39.706,24.925 42.998,24.925 43.63,25.557 U4.3
NetU4_4: U4.4 U6.12 | length 20
  Top Layer w0.3: U6.12 27.635,30.896 28.831,29.7 39.141,29.7 42.36,26.481 U4.4
NetU4_5: U4.5 U6.8 | length 22.4
  Top Layer w0.3: U6.8 24.398,35.231 24.501,35.127 24.501,33.17 28.472,29.2 38.371,29.2 41.09,26.481 U4.5
NetU4_6: U4.6 U6.13 | length 20.2
  Top Layer w0.5: v1(28.475,32.6) 28.475,32.627 28.439,32.663 28.439,33.912 U6.13 28.439,33.92 28.439,34.741 29.446,35.748 29.998,35.748 ; v1(32.574,28.55) 37.751,28.55 39.804,26.497 39.804,26.035 U4.6
  Bottom Layer w0.5: v1(28.475,32.6) 28.475,32.573 28.35,32.448 28.35,30.039 29.135,29.255 30.645,29.255 31.35,28.55 v1(32.574,28.55)
NRES: J5.10 U6.4 | length 28.6
  Top Layer w0.3: U6.4 23.964,38.388 28.238,38.388 v1(29.6,37.025) ; v1(35.7,36.775) 38.685,33.79 48.385,33.79 48.59,33.995 48.59,34.114 48.766,34.29 48.92,34.29 49.14,34.51 J5.10
  Bottom Layer w0.3: v1(29.6,37.025) 29.657,36.968 30.263,36.968 30.581,36.65 35.494,36.65 35.619,36.775 v1(35.7,36.775)
nSLEEP: R1.1 R5.1 R9.1 U1.3 U3.3 U4.11 U5.3 | length 38.9
  Top Layer w0.2: v1(29.825,12.725) 30.205,12.345 30.73,12.345 31.15,11.925 31.15,11.825 32.15,10.825 U3.3 ; U4.11 v1(39.82,11.92) 39.8,11.9 40.925,11.9 R9.1 41.15,11.775 42.1,10.825 U5.3
  Top Layer w0.254: R1.1 20.846,11.7 21.069,11.477 21.069,11.431 21.675,10.825 24.806,10.825 25.056,11.075 v1(25.15,11.075)
  GND_t w0.2: v1(29.825,12.725) 34.257,12.725 35.062,11.92 v1(39.82,11.92)
  GND_t w0.254: v1(25.15,11.075) 26.975,11.075 28.6,12.7 29.8,12.7 v1(29.825,12.725)
PGND: C1.1 C2.1 C5.1 C8.1 C9.1 C10.1 C12.1 C13.1 C14.1 C20.1 C21.1 C24.1 C25.1 C26.1 C27.1 C28.1 C29.1 C30.1 C31.1 C32.1 CON7.1 CON10.1 J4.1 Q1.G R2.2 R3.2 R4.2 R6.2 R7.2 R8.2 R10.2 R11.2 R12.2 R13.1 R14.1 R15.1 U1.6 U1.11 U1.14 U2.9 U2.15 U3.6 U3.11 U3.14 U4.9 U4.15 U5.6 U5.11 U5.14 U8.2 | length 87.4
  Top Layer w0.2: v1(22.299,16.45) 22.299,13.349 R3.2 22.3,13.25 23.2,12.35 U1.14 ; U1.11 25.836,13.386 26.1,13.65 R4.2 25.95,13.9 v1(25.95,16.55) ; v1(28.4,16.325) 28.4,13.5 R2.2
  Top Layer w0.254: v1(33.8,16.575) 35.013,16.575 35.925,15.663 35.925,13.7 36.023,13.602 U3.11@36.023,12.523 ; v1(37.25,17.5) 37.265,17.515 37.265,20.56 U4.9 ; R6.2 38.25,13.25 v1(38.25,16.5) ; v1(42.55,16.65) 42.55,13.325 R11.2 42.625,13.3 43.5,12.425 U5.14@44.694,12.425 ; v1(44.007,16.357) 46.032,14.332 46.032,13.812 46.194,13.65 46.194,12.614 46.196,12.612 46.196,11.725 ; 44.546,8.225 46.346,8.225
  Top Layer w0.4: U1.6@24.186,8.812 24.311,8.812 24.311,8.087 24.336,8.062 24.336,8.05 24.411,7.975 24.45,7.975 24.887,7.538 ; 24.746,7.375 24.871,7.5 24.925,7.5 24.887,7.538 ; U1.6@24.836,8.062 24.887,8.011 24.887,7.538 ; 24.925,7.65 25.336,8.062 25.836,8.062 25.861,8.087 25.861,8.812 U1.6@25.987,8.812
  Top Layer w0.5: J4.1 5.7,45.791 6.4,45.091 C10.1 6.3,42.9 6.3,40.1 v1(6.2,40) ; v1@21.755,17.497 21.755,19.164 21.68,19.239 21.755,19.314 U2.9 ; v1@21.756,17.496 21.756,17.219 v1(21.775,17.2) ; v1(29.375,18.941) U2.15 ; v1(32.425,14.975) 32.425,14.948 32.375,14.898 R7.2 32.475,13.65 33.725,12.4 34.475,12.4 U3.14 ; v1(44.875,18.525) 44.884,18.534 44.884,20.559 U4.15 ; R10.2@48.375,13.85 R10.2 48.325,15.998 48.6,16.273 v1(48.6,16.3)
  Top Layer w1: v1(36.225,24.125) v1(37.15,24.125)
  Bottom Layer w0.254: R14.1@4.202,39.054 R14.1@4.25,39.102 ; R13.1@6.752,39.102 R13.1@6.8,39.15 ; R15.1@9.598,39.15 R15.1@9.6,39.152
  Bottom Layer w0.5: v1(1.775,25.175) 5.7,29.1 5.7,39.052 ; R14.1@4.25,39.102 5.7,39.102 ; v1(6.2,40) 6.219,39.981 6.219,39.773 6.842,39.15 R15.1@9.598,39.15
  other v1: 10.8,0.7 11.556,0.7 12.313,0.7 13.069,0.7 13.825,0.7 0.675,0.738 1.431,0.738 2.187,0.738 2.944,0.738 3.7,0.738 10.8,1.469 11.556,1.469 12.325,1.469 13.069,1.469 13.825,1.469 0.675,1.506 1.431,1.506 2.2,1.506 2.944,1.506 3.7,1.506 10.8,2.237 11.556,2.237 12.325,2.237 13.069,2.237 13.825,2.237 0.675,2.275 1.431,2.275 2.2,2.275 2.944,2.275 3.7,2.275 10.8,3.006 11.556,3.006 12.325,3.006 13.069,3.006 13.825,3.006 0.675,3.044 1.431,3.044 2.2,3.044 2.944,3.044 3.7,3.044 10.8,3.775 11.556,3.775 12.325,3.775 13.069,3.775 13.825,3.775 0.675,3.812 1.431,3.812 2.2,3.812 2.944,3.812 3.7,3.812 36.939,4.818 33.494,4.846 34.175,4.838 34.875,4.838 35.575,4.838 36.275,4.838 47.064,4.897 26.814,4.905 44.3,4.917 45,4.917 45.7,4.917 46.4,4.917 23.369,4.934 24.05,4.925 24.75,4.925 25.45,4.925 26.15,4.925 43.619,4.925 36.939,5.501 33.494,5.529 34.175,5.521 34.875,5.521 35.575,5.521 36.275,5.521 47.064,5.58 24.05,5.608 24.75,5.608 25.45,5.608 26.15,5.608 26.814,5.589 43.619,5.609 44.3,5.6 45,5.6 45.7,5.6 46.4,5.6 23.369,5.617 36.939,6.184 33.494,6.213 34.175,6.204 34.875,6.204 35.575,6.204 36.275,6.204 47.064,6.264 24.05,6.292 24.75,6.292 25.45,6.292 26.15,6.292 26.814,6.272 43.619,6.292 44.3,6.283 45,6.283 45.7,6.283 46.4,6.283 23.369,6.3 36.939,6.868 33.494,6.896 34.175,6.888 34.875,6.888 35.575,6.888 36.275,6.888 47.064,6.947 23.369,6.955 24.058,6.955 24.747,6.955 25.436,6.955 26.125,6.955 26.814,6.955 43.619,6.975 44.3,6.967 45,6.967 45.7,6.967 46.4,6.967 47.2,16.3 47.9,16.3 49.264,16.28 47.2,16.983 47.9,16.983 48.6,16.983 49.264,16.964 5.5,19.297 6.269,19.297 7.038,19.297 7.806,19.285 8.531,19.313 7.775,20.029 5.469,20.041 6.238,20.041 7.006,20.041 8.5,20.056 9.269,20.044 5.469,20.785 6.238,20.785 7.006,20.785 7.775,20.785 9.938,20.797 10.706,20.785 8.5,20.8 9.269,20.8 11.431,20.813 12.138,20.81 5.469,21.541 6.238,21.541 7.006,21.541 7.775,21.541 8.5,21.556 9.269,21.556 9.938,21.541 10.706,21.541 11.431,21.556 12.138,21.554 44.056,23.663 48.556,23.663 44.781,23.69 45.481,23.675 46.25,23.675 47.019,23.675 47.787,23.675 49.281,23.69 44.056,24.419 45.481,24.419 46.25,24.419 47.019,24.419 47.787,24.419 48.556,24.419 44.781,24.434 49.281,24.434 7.005,24.545 11.505,24.545 5.467,24.557 6.236,24.557 7.729,24.572 8.43,24.557 9.198,24.557 9.967,24.557 10.736,24.557 12.229,24.572 5.467,25.301 6.236,25.301 7.005,25.301 7.729,25.316 8.43,25.301 9.198,25.301 9.967,25.301 10.736,25.301 11.505,25.301 12.229,25.316
PWM_D_M1_P: U1.10 U2.13 | length 9.2
  Top Layer w0.254: U1.10 26.487,12.874 26.777,13.165 26.777,20.795 U2.13
PWM_D_M2_P: U2.11 U3.10 | length 26.4
  Top Layer w0.254: U2.11 24.31,20.868 24.31,24.085 v1(24.325,24.1) ; v1(32.775,24.05) 35.023,21.802 35.023,18.215 36.675,16.563 U3.10
  Bottom Layer w0.254: v1(24.325,24.1) 25.352,25.127 31.698,25.127 v1(32.775,24.05)
PWM_D_M3_P: U4.13 U5.10 | length 10.6
  Top Layer w0.2: U4.13 42.36,18.84 44.243,16.957 44.256,16.957 44.607,16.606 44.607,16.593 46.846,14.354 U5.10
PWM_M1_P: U1.9 U2.14 | length 10.4
  Top Layer w0.2: U1.9 26.512,11.35 26.853,11.35 27.527,12.023 27.527,18.427 28.105,19.005
  Top Layer w0.254: 28.105,19.005 U2.14
PWM_M2_P: U2.12 U3.9 | length 25
  Top Layer w0.2: 35.477,18.403 37.275,16.605 37.275,11.583 37.042,11.35 36.7,11.35 U3.9
  Top Layer w0.254: U2.12 25.565,21.315 27.216,22.966 27.216,23.166 28.727,24.677 33.035,24.677 35.477,22.235 35.477,18.403
PWM_M3_P: U4.14 U5.9 | length 11.3
  Top Layer w0.2: U4.14 43.63,18.22 47.446,14.404 47.446,11.583 47.213,11.35 46.871,11.35 U5.9
PWM_thrower_P: J4.3 U4.12 | length 66.8
  Top Layer w0.5: J4.3 3.16,38.794 1.375,37.009 1.375,28.058 2.933,26.5 v1(11.3,26.5) ; v1(39.975,24.275) 39.975,22.152 41.09,21.037 U4.12
  Bottom Layer w0.4: v1(11.3,26.5) 37.75,26.5 39.75,24.5 v1@40.1,24.5
  Bottom Layer w0.5: 9.711,26.079 10.132,26.5 v1(11.3,26.5)
SWCLK: J5.04 U6.24 | length 17.3
  Top Layer w0.5: U6.24 34.444,40.831 34.544,40.931 v1(34.571,40.931) ; v1(45.3,37.8) 45.315,37.785 45.315,35.55 J5.04
  Bottom Layer w0.5: v1(34.571,40.931) 35.344,40.931 37.01,39.265 44.757,39.265 45.281,38.742 45.281,37.819 v1(45.3,37.8)
SWDIO: J5.02 U6.23 | length 15
  Top Layer w0.5: U6.23 34.442,40.031 34.498,39.975 v1(34.525,39.975) ; J5.02 44.081,35.556 44.081,37.456 v1(44.1,37.475)
  Bottom Layer w0.5: v1(34.525,39.975) 34.544,39.956 34.794,39.956 36.367,38.383 43.17,38.383 44.078,37.475 v1(44.1,37.475)
USB_D_N: J6.3 U6.21 U7.4 | length 18.1
  Top Layer w0.381: U6.21 32.182,38.463 32.982,38.463 33.001,38.482 35.55,38.482 37.35,40.283 39.701,40.283 39.925,40.059 39.925,39.325 U7.4 39.975,39.325 39.975,40.059 40.198,40.283 42.533,40.283 45.193,42.942 45.193,44.468 J6.3
USB_D_P: J6.4 U6.22 U7.3 | length 17.1
  Top Layer w0.381: U6.22 32.213,39.168 32.951,39.168 33.001,39.117 35.287,39.117 37.087,40.918 39.701,40.918 39.925,41.141 39.925,41.875 U7.3 39.975,41.875 39.975,41.141 40.198,40.918 42.27,40.918 44.558,43.205 44.558,44.468 J6.4
pads on no net: J1. J2. J3. J4. J4.4 J5.03 J5.06 J5.08 J6. U1.1 U1.13 U2.7 U2.10 U3.1 U3.13 U4.7 U4.10 U5.1 U5.13 U6.2 U6.3 U6.9 U6.26 U6.27 U6.28 U7.1 U8.4 U9.4

## Polygon pours and split planes (outlines as drawn)
PGND on GND_b "PGND_L03_P000" (solid, pour order 0): -0.3,25 -0.175,-0.75 50.575,-0.75 50.45,25 31.7,25 31.825,25 16.325,25
GND on GND_b "GND_L03_P001" (solid, pour order 1): -0.3,50 -0.3,25.45 50.45,25.45 50.45,50
PGND on GND_t "PGND_L02_P002" (solid, pour order 2): -0.3,24.8 50.45,24.8 50.45,-0.5 -0.3,-0.5
GND on GND_t "GND_L02_P003" (solid, pour order 3): 7.95,50 50.45,50 50.45,25.35 7.95,25.35
BAT+ on Top Layer "BAT+_L01_P029" (solid, pour order 29): 5.275,3.85 5.275,12.625 14.35,12.625 14.35,7.275 14.35,4.45 9.275,4.45 9.275,3.85
PGND on Top Layer "PGND_L01_P008" (solid, pour order 8): 0.125,4.275 0.15,4.3 0.15,11.075 2.725,11.075 2.975,11.475 2.975,16.175 3.675,16.175 3.675,14.95 6.6,14.95 6.6,8.9 4.2,6.5 4.2,4.225 0.175,4.225 0.15,4.2 0.15,4.325
+16V on Top Layer "+16V_L01_P045" (solid, pour order 45): 4.525,17.35 0.375,17.35 0.375,11.35 0.384,11.341 2.796,11.341 2.796,16.396 2.8,16.4 4.375,16.25
+5V_P on Top Layer "+5V_P_L01_P043" (solid, pour order 43): 0.525,24.025 0.525,23.975 0.525,17.45 3.725,17.45 3.75,17.425 3.8,17.475 3.8,22.525 20.875,22.525 20.875,24.175 0.7,24.175 0.525,24.175 0.525,23.95
PGND on Top Layer "PGND_L01_P041" (solid, pour order 41): 4.225,22.375 4.225,18.7 4.95,17.975 20.85,17.975 20.85,22.324
+16V on Top Layer "+16V_L01_P039" (solid, pour order 39): 3.925,15.2 3.95,15.175 17.375,15.175 17.375,11.075 17.325,11.025 17.45,10.9 20.075,10.9 20.075,17.75 20.05,17.775 4.6,17.775 3.925,17.1
+16V on Top Layer "+16V_L01_P028" (solid, remove dead copper, pour order 28): 45.55,10.55 45.55,10 49.825,10 49.825,11.8 48.45,11.8 47.2,10.55
+16V on Top Layer "+16V_L01_P020" (solid, pour order 20): 25,10.5 25,9.975 22.113,9.975 19.125,6.988 18.788,6.988 18.788,11.55 19.888,11.55 20.938,10.5
+16V on Top Layer "+16V_L01_P019" (solid, pour order 19): 14.575,0.268 14.575,7.65 14.575,11.25 18.9,11.25 18.875,11.225 18.875,9.8 20.3,9.8 20.3,0.232
NetCON8_1 on Top Layer "NETCON8_1_L01_P018" (solid, pour order 18): 45.5,9.75 49.775,9.75 49.825,9.7 49.825,0.242 45.5,0.28
NetCON6_1 on Top Layer "NETCON6_1_L01_P014" (solid, pour order 14): 45.3,9.75 40.325,9.75 40.325,0.25 45.3,0.25
NetCON4_1 on Top Layer "NETCON4_1_L01_P013" (solid, pour order 13): 35.375,9.825 40.175,9.825 40.175,0.225 35.375,0.225
NetCON3_1 on Top Layer "NETCON3_1_L01_P012" (solid, pour order 12): 35.175,9.761 35.175,0.275 30.025,0.275 30.025,9.761
NetCON2_1 on Top Layer "NETCON2_1_L01_P011" (solid, pour order 11): 25.2,9.75 30.025,9.75 30.025,0.225 25.2,0.225
NetCON1_1 on Top Layer "NETCON1_1_L01_P010" (solid, pour order 10): 20.3,9.75 20.3,0.225 24.988,0.225 25.013,9.75
PGND on Top Layer "PGND_L01_P042" (solid, pour order 42): 0.55,25.575 0.55,24.225 20.875,24.225 20.875,25.575 1.825,25.575
PGND on Top Layer "PGND_L01_P038" (solid, pour order 38): 6.6,14.95 17.15,14.95 17.15,11.55 14.6,11.55 14.6,12.9 14.625,12.925 6.6,12.925
PGND on Top Layer "PGND_L01_P005" (solid, pour order 5): 43.3,9.1 47.5,9.1 47.5,4.4 43.3,4.4
+16V on Top Layer "+16V_L01_P026" (solid, pour order 26): 31.573,10.975 31.725,10.975 32.225,10.475 32.225,9.775 31.573,9.198
+16V on Top Layer "+16V_L01_P027" (solid, pour order 27): 35.375,10.5 35.376,10.499 35.376,10 45.35,10 45.35,10.5
+16V on Top Layer "+16V_L01_P047" (solid, pour order 47): 37.9,10.475 38.65,11.225 41.175,11.225 42,10.4 42,10.1 40.9,9.075 38.922,9.075 37.9,10.075
+16V on Top Layer "+16V_L01_P031" (solid, pour order 31): 44.171,10.5 46.529,10.5 46.529,10.005 46.53,10.004 46.505,9.979 44.155,9.979
+16V on Top Layer "+16V_L01_P022" (solid, pour order 22): 35.175,10 25.2,10 25.2,10.5 35.175,10.5 35.175,10.025
+16V on Top Layer "+16V_L01_P032" (solid, pour order 32): 23.908,10.51 26.266,10.51 26.266,10.016 26.267,10.015 26.242,9.99 23.892,9.99
PGND on Top Layer "PGND_L01_P007" (solid, pour order 7): 23.1,9.254 27.125,9.254 27.125,4.425 23.1,4.425
+16V on Top Layer "+16V_L01_P023" (solid, pour order 23): 28.503,11.35 28.453,9.325 31.703,9.3 31.678,9.325 31.628,11.35
+16V on Top Layer "+16V_L01_P025" (solid, pour order 25): 28.503,11.35 28.559,9.898 27.728,9.898 27.728,10.398
PGND on Top Layer "PGND_L01_P004" (solid, pour order 4): 33.211,9.075 33.65,9.075 37.305,9.028 37.305,4.394 33.211,4.394
+16V on Top Layer "+16V_L01_P030" (solid, pour order 30): 34.058,10.51 36.416,10.51 36.416,10.016 36.417,10.015 36.392,9.99 34.042,9.99
+3.3V on Bottom Layer "+3.3V_L04_P046" (solid, remove dead copper, pour order 46): 29.925,35.6 29.95,35.575 49.875,35.575 49.875,26.525 49.825,26.475 49.65,26.65 7.425,26.65 7.425,49.4 39.05,49.4 39.05,39 17.05,39 17.05,29.9 18.1,28.85 29.75,28.85
+5V_P on Bottom Layer "+5V_P_L04_P037" (solid, pour order 37): 49.6,23.675 49.636,18.225 1.6,18.225 1.6,23.675 21.175,23.675
PGND on Bottom Layer "PGND_L04_P017" (solid, pour order 17): 0.225,18.05 14.448,18.05 14.35,0.3 0.225,0.3 0.225,4.225
+16V on Bottom Layer "+16V_L04_P036" (solid, pour order 36): 18.875,15.756 49.85,15.756 49.85,9.774 19,9.9 19,12.156 19,4.156 14.875,4.156 14.825,15.756
PGND on Bottom Layer "PGND_L04_P048" (solid, pour order 48): 14.225,16.053 49.649,15.9 49.649,18.474 49.65,18.475 14.225,18.475
PGND on Bottom Layer "PGND_L04_P034" (solid, pour order 34): 49.975,0.105 49.975,9.575 19.2,9.8 19.2,0.249
+16V on Bottom Layer "+16V_L04_P035" (solid, pour order 35): 18.975,4.675 14.875,4.675 14.875,0.225 18.975,0.225

## Other copper
Top Layer:
  pour cut-out: 35.12,9.093 35.047,9.02 35.047,8.979

## Text inside footprints (layer, text, board x,y; h text height)
J6: Mechanical 13 "PCB END" at 40.45,48.45 h0.41 r180
U2: Top Overlay "*" at 29.883,25.48 h1.27 r270
U4: Top Overlay "*" at 45.408,25.202 h1.27 r270
U6: Top Overlay "*" at 23.209,40.952 h1.27; Mechanical 13 "*" at 24.593,40.596 h1.27